# Altium PCB esp8266.pcbdoc
Units mil, origin at the board's own origin, x right, y up, seen from the top; angles counter-clockwise.
Board outline 3456.69 x 4003.93 mil, 2 copper layers (Top Layer, Bottom Layer); 33 components, 118 nets, 125 pads, 90 vias.
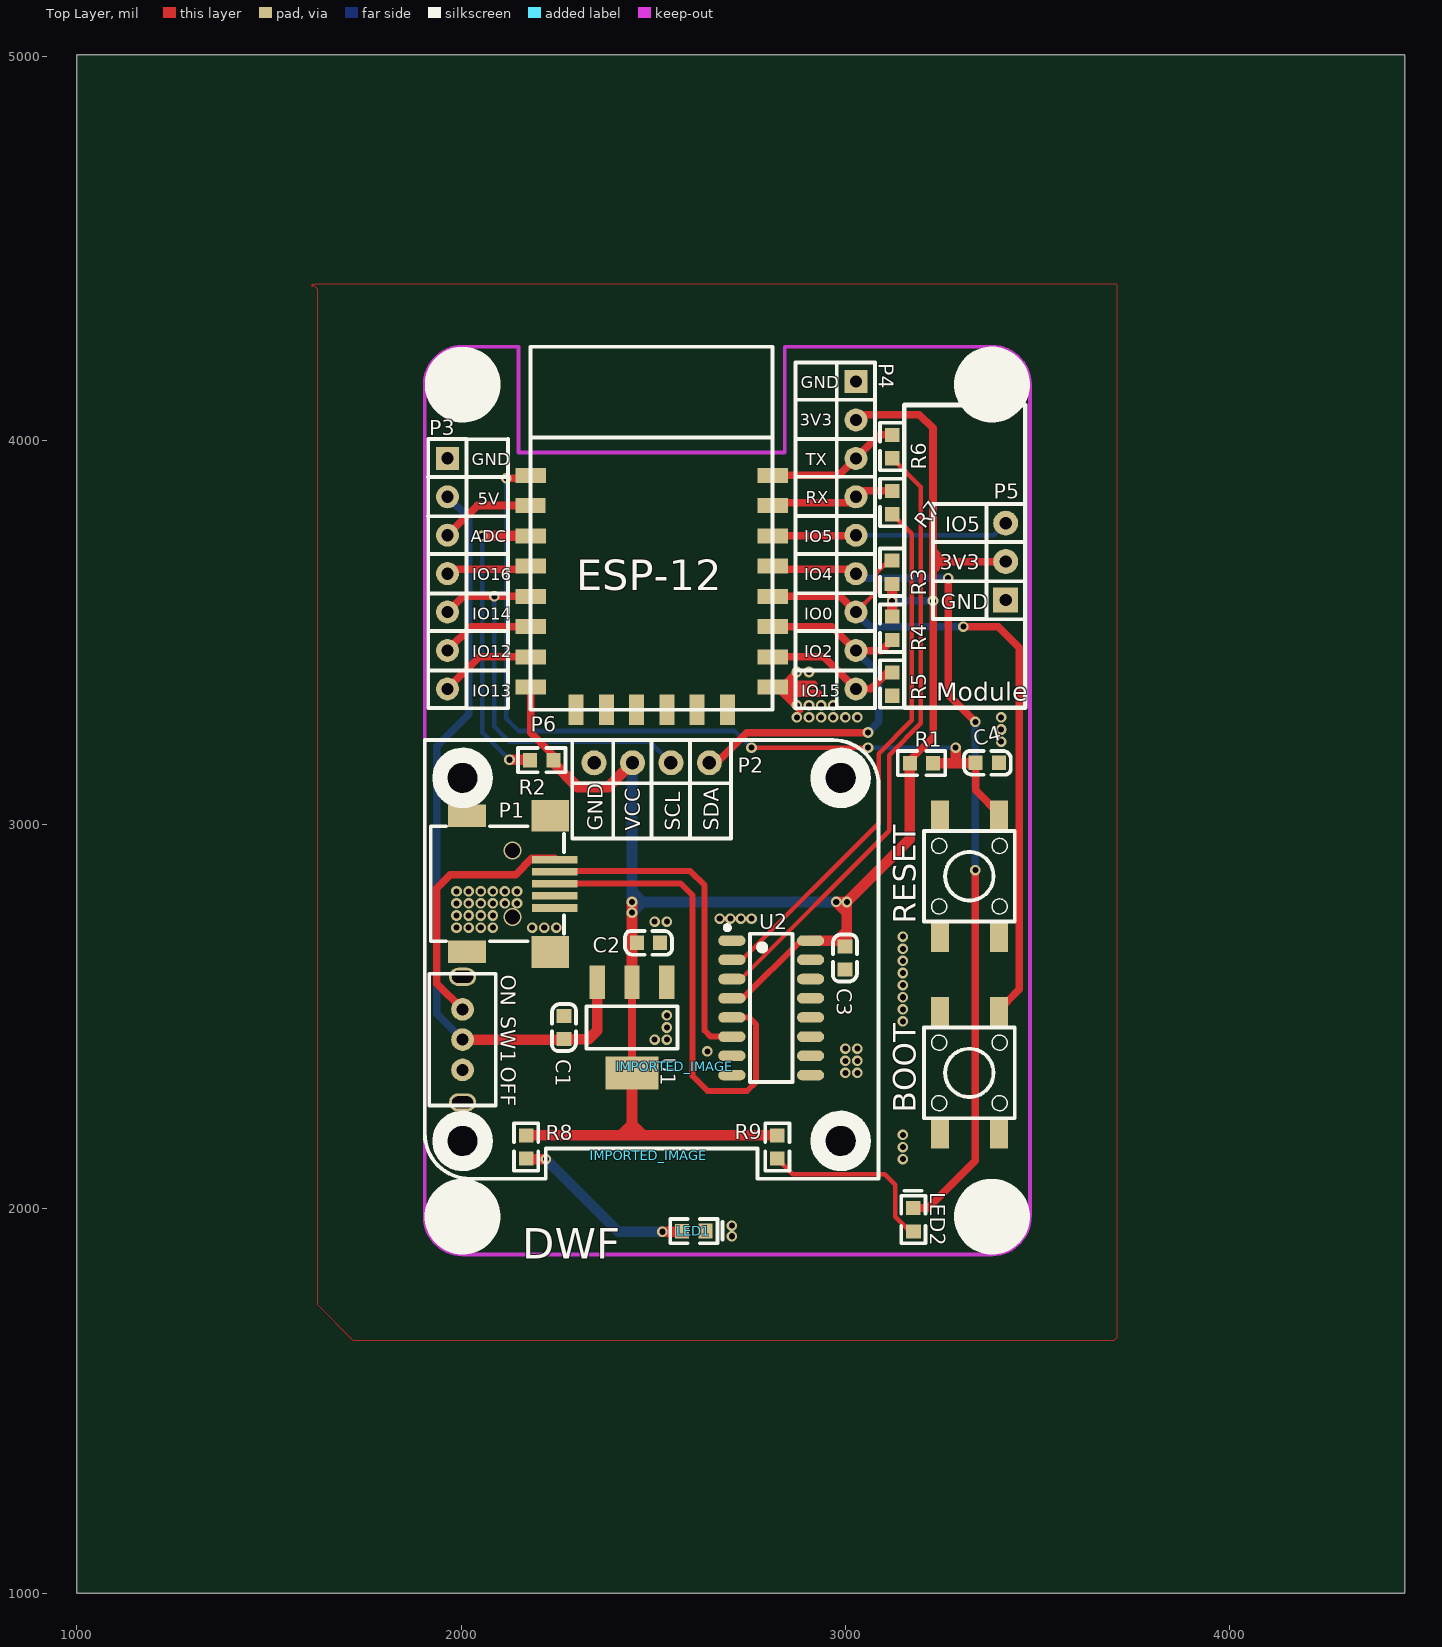
[diagram p0: Top Layer view]
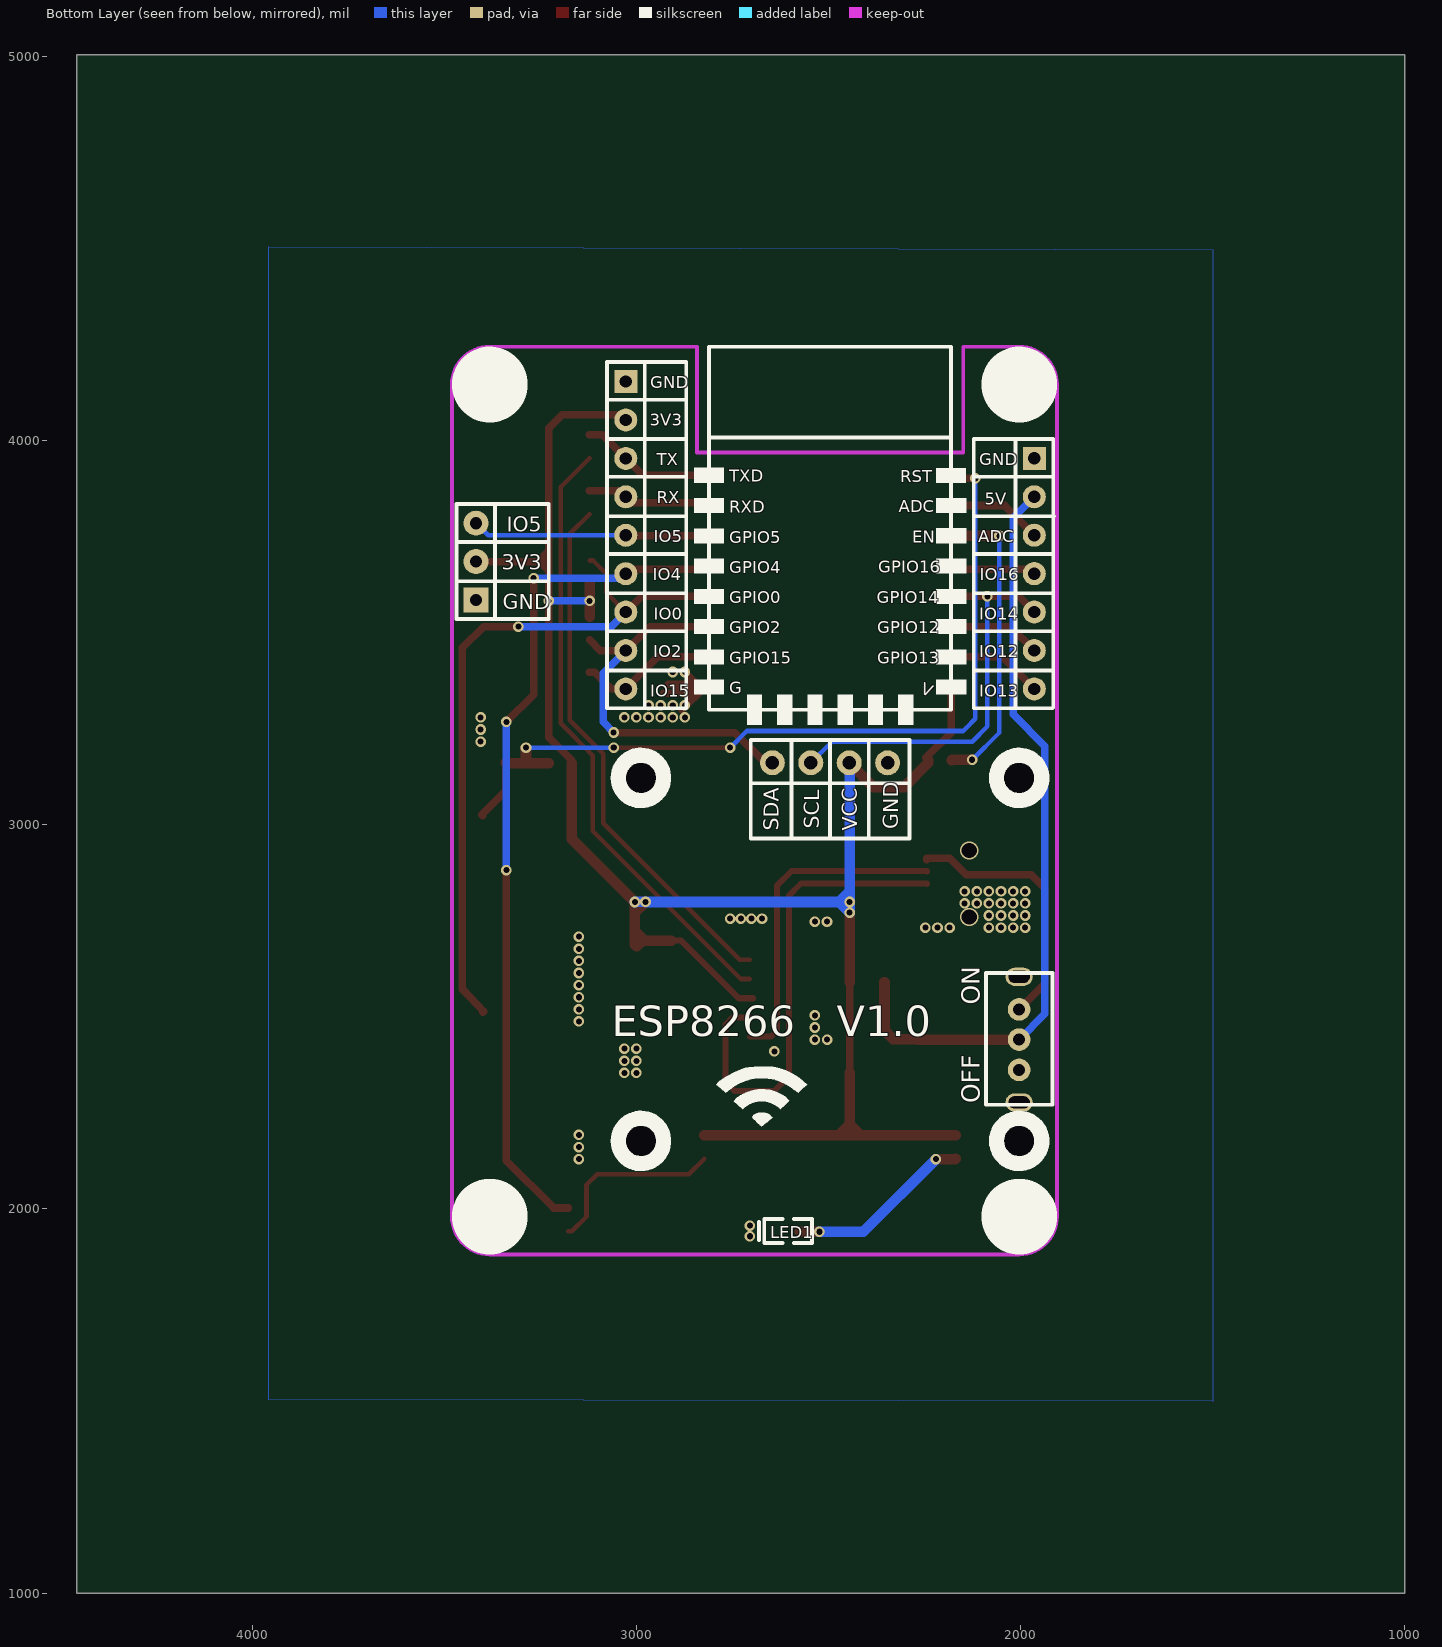
[diagram p1: Bottom Layer view, seen from below]

## Layer stack, top to bottom
Top Solder: solder mask 0.4, Solder Resist, Dk 3.5
Top Layer: signal copper 1.4
Dielectric1: dielectric 12.6, FR-4, Dk 4.8
Bottom Layer: signal copper 1.4
Bottom Solder: solder mask 0.4, Solder Resist, Dk 3.5

## Board outline
4456.69,1000 1000,1000 1000,5003.93 4456.69,5003.93

## Design rules (kind name [scope] priority, off if disabled: settings)
Clearance [All] p1: gap=10 ignorepadtopadclearanceinfootprint=FALSE except(0: Arc-Hole Track-Hole SMDPad-Hole THPad-Hole Via-Hole Fill-Hole Poly-Hole Region-Hole Text-Hole)
PolygonConnect [All] p1: connectstyle=Relief reliefconductorwidth=10 reliefentries=4 polygonreliefangle="90 Angle" airgapwidth=10
RoutingVias [All] p1: holewidth=28 width=50 viastyle="Through Hole" minholewidth=28 minwidth=50 maxholewidth=28 maxwidth=50
SolderMaskExpansion [All] p1: expansion=4 istentingtop=FALSE
Width [All] p1: maxlimit=10 minlimit=10 preferedwidth=10
30 further rules are at their usual default settings.

## Components (designator, comment, footprint, x,y, rotation, side; value= is the part's Value field where it differs from the comment)
BOOT "SW_PUSH_JX" SW_PUSH_6MM_H5MM_JX 3322.94,2354.25 r90 top
C1 "10uF" 0603_C_JX#1 2267.93,2472.3 r270 top
C2 "1uF" 0603_C_JX#2 2488.32,2692.83 r180 top
C3 "104" 0603_C_JX#3 3000.13,2653.46 r90 top
C4 "104" 0603_C_JX#2 3370.2,3161.33 r180 top
IMPORTED_IMAGE "Comment" IMPORTED_IMAGE 2555.8,2370.79 r0 top
IMPORTED_IMAGE "Comment" IMPORTED_IMAGE 2488.87,2138.51 r0 top
LED1 "Red_LED" 0603_D_JX#1 2606.43,1940.86 r180 top
LED2 "Green_LED" 0603_D_JX#2 3177.29,1972.36 r270 top
Module "_" ? 3311.15,3698.74 r0 top
P1 "MINI-USB_JX" USB_MINI_B_FE_JX 2252.1,2846.38 r0 top
P2 "0.96'OLED-IIC(4Pin)" 0.96'OLED-IIC(4PIN) 2496.19,3161.34 r0 top
P3 "M_2.54_1*7P_JX" M_2.54_1*7P_JX 1964.74,3653.52 r270 top
P4 "M_2.54_1*9P_JX" M_2.54_1*9P_JX 3027.74,3753.42 r270 top
P5 "M_2.54_1*3P_JX" 2.54-1*3P_JX 3417.54,3684.92 r90 top
P6 "ESP-12F_JX" ESP-12F_JX 2496.19,3771.57 r0 top
R1 "10k" 0603_R_JX#1 3197.06,3161.28 r0 top
R2 "10k" 0603_R_JX#1 2208.79,3169.21 r0 top
R3 "10k" 0603_R_JX#2 3122.17,3657.4 r270 top
R4 "10k" 0603_R_JX#2 3122.25,3511.67 r270 top
R5 "10k" 0603_R_JX#2 3122.17,3366.06 r90 top
R6 "100R" 0603_R_JX#2 3122.17,3984.17 r90 top
R7 "100R" 0603_R_JX#2 3122.17,3838.5 r90 top
R8 "10k" 0603_R_JX#2 2169.5,2161.27 r90 top
R9 "10k" 0603_R_JX#2 2823.04,2161.27 r90 top
RESET "SW_PUSH_JX" SW_PUSH_6MM_H5MM_JX 3322.94,2866.06 r90 top
SW1 "SW_SK-12D02_JX" SW_SK-12D02_JX 2004.07,2440.86 r180 top
U1 "BL1117-33CX" SOT223_JX 2445.01,2472.36 r90 top
U2 "CH340C_JX" SOP16_150MIL_JX 2807.21,2523.54 r270 top
? "" ? 1786.44,3062.94 r0 top
? "" ? 2693.12,4349.2 r0 top
? "" ? 3585.78,3062.84 r0 top
? "" ? 2693.05,1790.22 r0 top

## Footprints (in the part's own frame and the unit in brackets; to place one, negate y for a bottom-side part, rotate by r counter-clockwise, add the part's x,y. Pads: shape width x height; smd on the part's side, far side on the other; paste and mask are expansions set on the pad)
0.96'OLED-IIC(4PIN) [mm]
  round 1.65 hole 0.89: 1(-3.806,-0.003) 2(-1.266,0) 3(1.274,0) 4(3.814,0)
  round 2 hole 2 unplated: ""(-12.498,-25.002) ""(-12.498,-1.001) ""(12.501,-25.002) ""(12.501,-1.001)
  silkscreen extent -15,-27.5 15,1.5
2.54-1*3P_JX [mil]
  rect 65x65 hole 31.89: 1(-100,0)
  round 65 hole 31.89: 2(0,0) 3(100,0)
  silkscreen extent -150,-50 150,50
0603_C_JX#1 [mil]
  rect 36.61x38.58 smd: 1(-30.31,-0.21) 2(30.37,-0.01)
  silkscreen extent -61,-31 61,31
0603_C_JX#2 [mil]
  rect 36.61x38.58 smd: 1(-30.07,-0.07) 2(30.62,0.13)
  silkscreen extent -61,-31 61,31
0603_C_JX#3 [mil]
  rect 36.61x38.58 smd: 1(-30.63,0.65) 2(30.06,0.85)
  silkscreen extent -61,-30 61,32
0603_D_JX#1 [mil]
  rect 36.61x38.58 smd: 1(31.13,-1.26) 2(-29.55,-1.46)
  silkscreen extent -74,-33 62,30
0603_D_JX#2 [mil]
  rect 36.61x38.58 smd: 1(30.38,-0.01) 2(-30.31,-0.21)
  silkscreen extent -75,-32 61,31
0603_R_JX#1 [mil]
  rect 36.61x38.58 smd: 1(-29,-1.19) 2(31.68,-1.19)
  silkscreen extent -60,-33 63,30
0603_R_JX#2 [mil]
  rect 36.61x38.58 smd: 1(-30.31,-0.11) 2(30.38,-0.11)
  silkscreen extent -62,-32 62,31
ESP-12F_JX [mm]
  rect 2x1 smd: 1(-8,3.499) 2(-8.002,1.504) 3(-8.001,-0.5) 4(-8.001,-2.501) 5(-8.001,-4.502) 6(-8.001,-6.501) 7(-8,-8.5) 8(-8.001,-10.502) 15(7.998,-10.499) 16(7.998,-8.498) 17(7.998,-6.497) 18(8,-4.501) 19(8,-2.501) 20(8,-0.502) 21(8,1.497) 22(8,3.496)
  rect 1x2 smd: 9(-4.996,-11.998) 10(-2.996,-11.999) 11(-0.997,-11.998) 12(1.002,-11.998) 13(3.004,-11.998) 14(5.003,-11.998)
  silkscreen extent -8,-12 8,12
IMPORTED_IMAGE [mil]
M_2.54_1*7P_JX [mm]
  rect 1.52x1.52 hole 0.81: 1(-7.62,0)
  round 1.52 hole 0.81: 2(-5.08,0) 3(-2.54,0) 4(0,0) 5(2.54,0) 6(5.08,0) 7(7.62,0)
  silkscreen extent -8.89,-1.27 8.89,1.27
M_2.54_1*9P_JX [mm]
  rect 1.52x1.52 hole 0.81: 1(-10.16,0)
  round 1.52 hole 0.81: 2(-7.62,0) 3(-5.08,0) 4(-2.54,0) 5(0,0) 6(2.54,0) 7(5.08,0) 8(7.62,0) 9(10.16,0)
  silkscreen extent -11.43,-1.27 11.43,1.27
SOP16_150MIL_JX [mm]
  oval 0.7x1.8 smd: 1(-4.444,-2.6) 2(-3.174,-2.6) 3(-1.904,-2.6) 4(-0.634,-2.6) 5(0.636,-2.6) 6(1.906,-2.6) 7(3.176,-2.6) 8(4.446,-2.6) 9(4.446,2.602) 10(3.176,2.602) 11(1.906,2.602) 12(0.636,2.602) 13(-0.634,2.602) 14(-1.904,2.602) 15(-3.174,2.602) 16(-4.444,2.602)
  silkscreen extent -5.45,-3.05 4.9,1.4
SOT223_JX [mm]
  rect 2.2x1 smd: 1(3,-2.299) 2(3,-0.001) 3(3,2.3)
  rect 2.2x3.5 smd: 2(-3.001,-0.001)
  silkscreen extent -1.4,-3 1.4,3
SW_PUSH_6MM_H5MM_JX [mm]
  rect 2x1.2 smd: 1(-4,-1.95) 2(4,-1.95) 3(4,1.95) 4(-4,1.95)
  silkscreen extent -3,-3 3,3
SW_SK-12D02_JX [mm]
  round 1.5 hole 0.8: 1(0.001,2) 2(0.001,0.001) 3(0.001,-1.998)
  oval 1.8x1.2 hole 0.8 slot 1.4 at 0 deg: ""(0,4.15) ""(0,-4.15)
  silkscreen extent -2.2,-4.35 2.2,4.35
USB_MINI_B_FE_JX [mm]
  rect 3x0.5 smd: 1(-0.2,1.6) 2(-0.2,0.8) 3(-0.2,0) 4(-0.2,-0.8) 5(-0.2,-1.6)
  rect 2.5x1.5 smd: 5(-6,4.496) 5(-6,-4.501)
  rect 2.5x2.1 smd: 5(-0.5,4.501) 5(-0.498,-4.501)
  silkscreen extent -8.4,-3.8 0.4,3.8
? [mil]
  silkscreen extent -157,-394 157,394

## Free pads (board coordinates)
  round 118.11 hole 118.11 unplated: ""(2004.04,1980.22) ""(2004.04,4145.62) ""(3382.04,1980.22) ""(3382.04,4145.62)

## Via types
v1: diameter 27.56, hole 15.75, Top Layer to Bottom Layer, 88 vias
v2: diameter 47.24, hole 39.37, Top Layer to Bottom Layer, 2 vias

## Nets (pads, with @x,y where several pads share a name; then routed paths per layer and width w, separated by ;. In a path a pad name is that pad's centre, name@x,y a point inside that pad or via, vN(x,y) a via of type N, cw(c..) or ccw(c..) an arc to the next point about the centre after c; other vN are vias at no path point)
3V3: C2.2 C3.2 P2.2 P4.2 P5.2 P6.8 R1.1 R2.2 R3.2 R4.1 R8.2 R9.2 U1.2 U2.4 U2.16 | length 5670.1
  Top Layer w15.75: U2.4@2697.04,2548.52 2733.76,2548.52 2883.82,2698.58 U2.16@2909.63,2698.58
  Top Layer w19.68: P6.8 2181.24,3240.06 2246.86,3174.44 R2.2@2240.44,3168.02 ; U1.2@2445.04,2354.22 U1.2@2445.04,2590.42 ; P4.2 3041.16,4066.84 3193.05,4066.84 3228.44,4031.45 3228.44,3681.02 3228.44,3637.72 ; R1.1@3168.04,3160.12 3168.04,3167.83 3228.47,3228.26 v1@3228.47,3582.59 ; v1@3228.44,3583.02 3228.44,3661.22 3252.14,3685.02 P5.2@3417.54,3685.02 ; 3228.44,3688.92 3232.34,3685.02 3279.64,3685.02 ; 3228.44,3720.42 3228.44,3712.52 3256.04,3684.92
  Top Layer w27.56: R8.2 R9.2@2823.14,2191.62 ; R2.2@2240.44,3168.02 2240.44,3161.18 2303.28,3098.34 2383.36,3098.34 P2.2 ; 2393.84,2191.62 2416.24,2191.62 2445.04,2220.42 2473.84,2191.62 2519.84,2191.62 ; 2445.04,2191.62 U1.2@2445.04,2354.22 ; U1.2@2445.04,2590.42 2445.04,2744.01 v1(2445.04,2771.52) 2445.12,2771.53 v1@2445.12,2799.07 ; U2.16 2984.24,2698.52 2999.24,2683.52 3004.14,2688.42 v1(3004.14,2799.02) ; 2948.94,2698.52 2978.34,2698.52 3004.14,2724.32 ; 3004.14,2744.02 3004.14,2771.52 v1(2976.54,2799.12) 3004.04,2799.12 v1(3004.14,2799.02) ; R3.2@3122.04,3627.02 3122.14,3626.92 v1(3122.14,3582.62) R4.1 ; R1.1@3168.04,3160.12 3168.04,2962.92 v1(3004.14,2799.02)
  Bottom Layer w19.68: v1(3122.14,3582.62) v1(3228.44,3582.62)
  Bottom Layer w27.56: 2445.04,2842.42 2445.04,2826.52 2472.54,2799.02 ; v1(2445.14,2799.02) 2976.52,2799.02 v1(2976.54,2799.12) 3004.04,2799.13 v1@3004.11,2799.06 ; P2.2 2445.04,3160.02 v1(2445.04,2771.52) 2472.54,2799.02 ; 2496.24,2799.02 2472.54,2799.02
5V: C1.2 P3.2 SW1.2 U1.3 | length 1983.6
  Top Layer w27.56: SW1.2 2266.84,2440.82 C1.2 2331.9,2441.92 2354.44,2464.46 U1.3@2354.44,2590.42
  Bottom Layer w19.68: P3.2 2019.81,3798.45 2019.81,3287.31 1937.14,3204.64 1937.14,2507.72 SW1.2
$BOARDOUTLINENET: 
ADC: P3.3 P6.2 | length 248.4
  Top Layer w19.68: P3.3 2042.04,3830.82 P6.2
CH340_RXD: R6.1 U2.3 | length 1603.9
  Top Layer w11.81: U2.3@2704.84,2598.62 2728.74,2598.62 3114.34,2984.22 3114.34,3181.02 3196.94,3263.72 3196.94,3879.12 R6.1@3122.24,3953.82
CH340_TXD: R7.1 U2.2 | length 1390.4
  Top Layer w11.81: U2.2@2704.83,2648.58 2731.47,2648.58 3086.74,3003.85 3086.74,3184.92 3173.34,3271.62 3173.34,3757.12 R7.1@3122.24,3808.22
CS: P6.9
ESP_RST: C4.2 P6.1 R1.2 RESET.2 | length 2215.6
  Top Layer w11.81: v1(2756.14,3200.62) v1(3059.14,3200.62) v1@3059.18,3200.7
  Top Layer w19.68: v1(2118.24,3901.52) 2181.24,3901.49 P6.1 ; C4.2 3339.54,3089.64 3402.7,3026.48 RESET.2
  Top Layer w27.56: R1.2 3338.44,3160.12 C4.2 ; 3283.64,3160.12 3287.44,3163.92 v1(3287.44,3200.62)
  Bottom Layer w11.81: v1(2118.24,3901.52) 2118.24,3275.51 2141.86,3251.89 2149.74,3244.01 2362.33,3244.01 2712.67,3244.01 v1(2756.14,3200.62) ; v1(3059.14,3200.62) v1(3287.44,3200.62) v1@3287.53,3200.7
ESP_RXD: P4.4 P6.21 R7.2 | length 327
  Top Layer w19.68: P6.21 2819.12,3838.5 2980.44,3838.5 3012.82,3838.5 P4.4 3043.24,3868.92 R7.2@3122.24,3868.92
ESP_TXD: P4.3 P6.22 R6.2 | length 354.7
  Top Layer w19.68: P6.22 2983.54,3909.22 P4.3 3088.84,4014.52 R6.2@3122.24,4014.52
GND: BOOT.4 C1.1 C2.1 C3.1 C4.1 LED1.2 P1.5 P2.1 P3.1 P4.1 P5.1 P6.15 R5.1 RESET.4 U1.1 U2.1 | length 432.2
  Top Layer w19.68: P6.15@2834.74,3366.13 2917.42,3366.13 ; P6.15@2846.55,3342.48 2929.23,3342.48 ; v1(2874.14,3397.52) 2834.84,3358.22 P6.15 ; 2882.02,3299.13 2822.93,3358.22 P6.15 ; 2901.7,3362.12 2897.8,3358.22 P6.15
  other v1: 2704.84,1929.02 2704.84,1956.62 3149.84,2129.82 3149.84,2161.22 3149.84,2192.72 3000.14,2354.22 3031.64,2354.22 3000.14,2385.72 3031.64,2385.72 2641.04,2410.12 3000.14,2417.22 3031.74,2417.22 2504.04,2440.82 2535.54,2440.82 2535.54,2472.32 3149.74,2488.12 2535.54,2503.82 3149.74,2519.62 3149.74,2551.12 3149.74,2582.62 3149.74,2614.12 3149.74,2645.62 3149.74,2677.12 3149.74,2708.62 1988.34,2732.22 2019.84,2732.22 2051.34,2732.22 2082.84,2732.22 2185.14,2732.22 2216.64,2732.22 2248.14,2732.22 2504.14,2747.92 2535.64,2747.92 2673.34,2755.82 2700.94,2755.82 2728.54,2755.72 2756.14,2755.72 1988.34,2763.72 2019.84,2763.72 2051.34,2763.72 2082.84,2763.72 1988.34,2795.22 2019.84,2795.22 2051.34,2795.22 2082.84,2795.22 2114.34,2795.22 2145.84,2795.22 1988.34,2826.72 2019.84,2826.72 2051.34,2826.72 2082.84,2826.72 2114.34,2826.72 2145.84,2826.72 3405.64,3216.42 3405.74,3247.92 2874.14,3279.42 2905.64,3279.42 2937.14,3279.42 2968.64,3279.42 3000.14,3279.42 3031.64,3279.42 3405.64,3279.42 2874.14,3310.92 2905.64,3310.92 2937.14,3310.92 2968.64,3310.92 2905.64,3397.52
  other v2: 2134.04,2759.79 2134.04,2932.99
GPIO0: BOOT.2 P4.7 P6.18 R3.1 | length 1847.9
  Top Layer w11.81: P4.7 3078.87,3604.55 3078.87,3653.46 3113.13,3687.72 R3.1@3122.04,3687.72
  Top Layer w19.68: P6.18@2811.14,3594.32 2986.84,3594.32 P4.7 ; v1(3307.24,3515.62) 3397.81,3515.62 3452.88,3460.55 3452.88,2571.73 3397.38,2513.99 BOOT.2
  Bottom Layer w19.68: P4.7 3065.48,3515.68 v1@3307.23,3515.68
GPIO2: P2.4 P4.8 P6.17 R4.2 | length 1043.1
  Top Layer w19.68: P2.4 2665.46,3161.32 2744.14,3240 v1(3059.24,3240.02) ; P6.17@2811.14,3515.72 2965.44,3515.72 P4.8 3094.24,3453.42 R4.2
  Bottom Layer w19.68: P4.8 3086.74,3394.42 3086.74,3330.63 3086.74,3267.52 v1(3059.24,3240.02)
GPIO4: LED2.2 P4.6 P6.19 | length 2227.6
  Top Layer w19.68: P6.19 2818.99,3665.27 2960.76,3665.27 3015.89,3665.27 P4.6 ; LED2.2@3177.04,2002.62 3215.43,2002.62 3338.74,2125.93 v1(3338.74,2881.82) ; v1(3267.84,3641.62) 3267.84,3338.5 v1(3338.74,3267.62)
  Bottom Layer w19.68: P4.6 3039.51,3641.65 3098.55,3641.65 v1(3267.84,3641.62) ; v1(3338.74,2881.82) v1(3338.74,3267.62)
GPIO5: P4.5 P5.3 P6.20 | length 620.1
  Top Layer w19.68: P6.20 3026.14,3751.82 P4.5
  Bottom Layer w11.81: P4.5 3386.04,3753.42 P5.3
GPIO9: P6.11
GPIO10: P6.12
GPIO12: P3.6 P6.6 | length 242.2
  Top Layer w19.68: P3.6 2026.84,3515.62 P6.6
GPIO13: P3.7 P6.7 | length 251
  Top Layer w19.68: P3.7 2048.14,3436.92 P6.7
GPIO14: P2.3 P3.5 P6.5 | length 1070.8
  Top Layer w19.68: P3.5 2005.64,3594.42 v1(2086.74,3594.42) 2086.84,3594.32 P6.5
  Bottom Layer w11.81: v1(2086.74,3594.42) 2086.74,3255.83 2126.12,3216.45 2491.21,3216.45 P2.3
GPIO15: P4.9 P6.16 R5.2 | length 363.5
  Top Layer w19.68: P6.16 2944.14,3437.02 P4.9 3066.22,3353.42 3082.8,3370 3109.22,3396.42 R5.2@3122.24,3396.42
GPIO16: P3.4 P6.4 | length 224.6
  Top Layer w19.68: P3.4 1976.49,3665.27 2098.55,3665.27 2173.39,3665.27 P6.4
LED1_1: LED1.1 R8.1 | length 485
  Top Layer w27.56: R8.1@2169.64,2130.92 2170.74,2129.82 v1(2220.64,2129.82) ; v1@2523.86,1940.76 2573.98,1940.76 LED1.1
  Bottom Layer w27.56: v1(2220.64,2129.82) 2409.7,1940.76 v1@2523.86,1940.76
  other v1: 2523.84,1940.82
MISO: P6.10
MOSI: P6.13
P1_1: P1.1 SW1.3 | length 685.9
  Top Layer w19.68: SW1.3 1937.14,2586.42 1937.14,2834.52 1972.54,2870.02 2141.84,2870.02 2184.74,2912.92 2244.24,2912.92 P1.1
R9_1: LED2.1 R9.1 | length 480.8
  Top Layer w11.81: R9.1@2823.14,2130.92 2863.59,2090.47 3102.49,2090.47 3130.05,2062.91 3130.05,1980.23 3168.26,1942.02 LED2.1@3177.24,1942.02
S$6: 
S$35: 
S$43: 
S$77: 
S$600: 
S$602: 
S$604: 
S$606: 
S$608: 
S$610: 
S$612: 
S$614: 
S$618: 
S$623: 
S$625: 
S$631: 
S$633: 
S$635: 
S$674: 
S$676: 
S$689: 
S$691: 
S$693: 
S$796: 
S$798: 
S$800: 
S$802: 
S$1631: 
S$1663: 
S$1665: 
S$1667: 
S$1669: 
S$1671: 
S$1673: 
S$1675: 
S$1677: 
S$1679: 
S$1681: 
S$1683: 
S$1685: 
S$1687: 
S$1689: 
S$1691: 
S$1693: 
S$1695: 
S$1697: 
S$1699: 
S$1701: 
S$1703: 
S$1705: 
S$1707: 
S$1709: 
S$1711: 
S$1713: 
S$1715: 
S$1717: 
S$1719: 
S$1721: 
S$1723: 
S$1744: 
S$1746: 
S$1748: 
S$1750: 
S$1752: 
S$1754: 
S$1756: 
S$1758: 
S$1776: 
S$1778: 
S$1780: 
S$1782: 
S$1784: 
S$1786: 
S$1788: 
S$1807: 
S$1809: 
S$1811: 
S$1813: 
S$1815: 
S$1884: 
S$1886: 
S$1888: 
S$1890: 
S$1936: 
S$1938: 
S$1941: 
S$1943: 
SCK: P6.14
U1_3: P6.3 R2.1 | length 792
  Top Layer w27.56: v1@2055.35,3751.86 P6.3 P6.3@2181.24,3751.82 ; v1(2126.24,3169.12) 2178.74,3169.12 R2.1
  Bottom Layer w11.81: v1(2055.34,3751.82) 2055.34,3240.02 v1(2126.24,3169.12)
USB_D+: P1.3 U2.5 | length 1253.4
  Top Layer w15.75: P1.3 2244.24,2847.12 2571.74,2847.12 2602.54,2816.42 2602.54,2346.32 2641.84,2307.02 2744.24,2307.02 2767.84,2330.62 2767.84,2480.22 2749.54,2498.62 U2.5@2704.84,2498.62
USB_D-: P1.2 U2.6 | length 861.7
  Top Layer w15.75: P1.2 2244.24,2879.42 2596.54,2879.42 2633.94,2842.02 2633.94,2464.52 2649.94,2448.62 U2.6@2704.84,2448.62
pads on no net: BOOT.1 BOOT.3 P1.4 P2. RESET.1 RESET.3 SW1. SW1.1 U2.7 U2.8 U2.9 U2.10 U2.11 U2.12 U2.13 U2.14 U2.15

## Polygon pours and split planes (outlines as drawn)
GND on Bottom Layer "Bottom Layer-GND" (solid, pour order 0): 1500,4496.05 1500,1500 3956.69,1503.93 3956.69,4503.93
GND on Top Layer "Top Layer-GND" (solid, pour order 1): 1720.21,1657.4 1627.29,1750.31 1627.29,4393.22 1616.66,4403.85 1613.12,4400.31 1613.12,4407.4 1616.66,4403.85 1620.21,4407.4 3706.03,4407.4 3706.03,1664.49 3698.94,1657.4 1720.21,1657.4

## Keep-outs
Keep-Out Layer:
  lines w10: 1905.52,1980.35 ccw(c2003.94,1980.35) 2003.94,1881.92 ; 1905.65,4145.56 cw(c2004.07,4145.56) 2004.07,4243.99 ; 3381.91,1881.84 ccw(c3381.91,1980.27) 3480.33,1980.27 ; 3382.01,4244.01 cw(c3382.01,4145.58) 3480.44,4145.58

## Other copper
Top Layer:
  pour cut-out: 2149.73,3968.42 2149.73,3263.7 2842.65,3263.7 2842.65,3968.42

## Silkscreen, mask and mechanical layers (free items; w line width, h text height)
Top Overlay:
  circle w157.48: c2004.07,4145.58 r19.69
  circle w157.48: c3381.9,4145.68 r19.69
  circle w157.48: c2003.97,1980.28 r19.69
  circle w157.48: c3381.9,1980.28 r19.69
  circle w39.37: c2004.07,2177.08 r59.06
  circle w39.37: c2988.2,2177.15 r59.06
  circle w39.37: c2003.97,3121.98 r59.06
  circle w39.37: c2988.2,3121.98 r59.06
  lines w9.84: 2289.5,3108.19 2702.88,3108.19
  lines w10: 1913.51,3803.07 2122.18,3803.07 ; 1913.51,3905.43 2122.18,3905.43 ; 1917.45,3401.49 2122.18,3401.49 ; 1917.45,3503.85 2122.18,3503.85 ; 1917.45,3602.28 2122.18,3602.28 ; 1917.45,3704.64 2122.18,3704.64 ; 2011.94,3303.07 2122.18,3303.07 2122.18,4003.85 ; 2015.88,4003.46 2122.18,4003.46 ; 2870.12,3602.42 3074.82,3602.42 ; 2870.13,3704.76 3074.86,3704.76 ; 2870.13,3803.19 3074.86,3803.19 ; 2870.13,3905.54 3074.86,3905.54 ; 2870.15,4203.46 2976.45,4203.46 ; 2870.21,3401.49 3074.93,3401.49 ; 2870.21,3503.85 3074.93,3503.85 ; 2870.21,4003.85 3074.93,4003.85 ; 2870.21,4106.21 3074.93,4106.21 ; 2870.21,4200.7 2870.21,3303.07 2980.44,3303.07 ; 3228.47,3633.77 3464.69,3633.77 ; 3228.47,3736.14 3464.69,3736.14 ; 3366.27,3535.35 3228.47,3535.35 3228.47,3834.56 3366.27,3834.56
  text "GND" at 2883.94,4136.27 h31.5
  text "3V3" at 2881.94,4037.87 h31.5
  text "GND" at 2027.74,3935.57 h31.5
  text "TX" at 2897.74,3935.47 h31.5
  text "RX" at 2897.74,3837.07 h31.5
  text "5V" at 2043.44,3833.07 h31.5
  text "IO5" at 3259.94,3761.93 h39.37
  text "ADC" at 2025.74,3734.77 h31.5
  text "IO5" at 2893.84,3734.67 h31.5
  text "3V3" at 3246.14,3663.43 h39.37
  text "IO16" at 2029.74,3636.27 h31.5
  text "IO4" at 2893.84,3636.27 h31.5
  text "ESP-12" at 2299.34,3610.55 h78.74
  text "GND" at 3248.14,3561.03 h39.37
  text "IO14" at 2029.64,3533.97 h31.5
  text "IO0" at 2893.84,3533.97 h31.5
  text "IO12" at 2029.74,3435.47 h31.5
  text "IO2" at 2893.84,3435.47 h31.5
  text "IO13" at 2029.64,3333.17 h31.5
  text "IO15" at 2885.94,3333.17 h31.5
  text "ON" at 2102.86,2610.22 h39.37 r270
  text "OFF" at 2102.86,2370.02 h39.37 r270
  text "DWF" at 2159.58,1870.94 h80
Bottom Overlay:
  circle w157.48: c3381.89,4145.69 r19.69
  circle w157.48: c2003.99,4145.69 r19.69
  circle w157.48: c2003.99,1980.26 r19.69
  circle w157.48: c3381.92,1980.26 r19.69
  circle w39.37: c2004.15,3121.9 r59.06
  circle w39.37: c2988.32,3121.96 r59.06
  circle w39.37: c2988.32,2177.08 r59.06
  circle w39.37: c2004.07,2177.08 r59.06
  rectangle: 2141.86,3889.68 2220.6,3929.05
  rectangle: 2141.76,3810.98 2220.5,3850.35
  rectangle: 2141.76,3732.31 2220.5,3771.68
  rectangle: 2141.76,3653.48 2220.5,3692.85
  rectangle: 2141.76,3574.81 2220.5,3614.18
  rectangle: 2141.76,3496.01 2220.5,3535.38
  rectangle: 2141.76,3417.28 2220.5,3456.65
  rectangle: 2141.76,3338.58 2220.5,3377.95
  rectangle: 2279.54,3259.77 2318.91,3338.51
  rectangle: 2358.31,3259.8 2397.68,3338.54
  rectangle: 2437.01,3259.8 2476.38,3338.54
  rectangle: 2515.77,3259.83 2555.14,3338.57
  rectangle: 2594.51,3259.82 2633.88,3338.56
  rectangle: 2673.31,3259.8 2712.68,3338.54
  rectangle: 2771.73,3338.61 2850.47,3377.98
  rectangle: 2771.66,3417.28 2850.4,3456.65
  rectangle: 2771.66,3496.08 2850.4,3535.45
  rectangle: 2771.66,3574.78 2850.4,3614.15
  rectangle: 2771.66,3653.48 2850.4,3692.85
  rectangle: 2771.66,3732.28 2850.4,3771.65
  rectangle: 2771.66,3810.98 2850.4,3850.35
  rectangle: 2771.66,3889.78 2850.4,3929.15
  lines w9.84: 1913.51,3803.07 2122.18,3803.07 ; 1915.48,3503.85 2122.18,3503.85 ; 1917.45,3401.49 2120.21,3401.49 ; 1917.45,3704.64 2122.18,3704.64 ; 1917.45,3905.43 2122.18,3905.43 ; 1919.42,3602.28 2122.18,3602.28 ; 2013.91,3303.07 2013.91,4003.85 ; 2183.2,4007.79 2811.15,4007.79 ; 2289.5,3108.19 2702.88,3108.19 ; 2395.8,2964.48 2395.8,3218.42 ; 2496.19,2966.45 2496.19,3220.39 ; 2590.68,1911.34 2543.43,1911.34 2543.43,1974.33 2590.68,1974.33 ; 2596.58,2966.45 2596.58,3220.39 ; 2620.21,1911.34 2667.45,1911.34 2667.45,1974.33 2620.21,1974.33 ; 2681.23,1919.21 2681.23,1966.46 ; 2872.17,3401.49 3074.93,3401.49 ; 2872.17,3503.85 3074.93,3503.85 ; 2872.17,3602.28 3074.93,3602.28 ; 2872.17,3704.64 3076.9,3704.64 ; 2872.17,3803.07 3076.9,3803.07 ; 2872.17,3905.43 3076.9,3905.43 ; 2872.17,4106.21 3076.9,4106.21 ; 2874.14,4003.85 3076.9,4003.85 ; 2976.5,4204.64 2978.47,4202.67 2978.47,4186.92 2978.47,3305.04 2980.44,3303.07 ; 3076.9,4202.67 3076.9,3303.07 2870.21,3303.07 2870.21,4204.64 3076.9,4204.64 ; 3228.47,3736.14 3468.63,3736.14 ; 3230.44,3633.77 3464.69,3633.77 ; 3368.24,3535.35 3368.24,3834.56 ; 1915.48,3305.04 1915.48,4003.85 2122.18,4003.85 2122.18,3303.07 1960.76,3303.07 1917.45,3303.07 1915.48,3305.04 ; 1917.45,2271.57 1917.45,2614.09 2090.68,2614.09 2090.68,2271.57 1917.45,2271.57 ; 2181.23,3299.13 2181.23,4244.01 2811.15,4244.01 2811.15,3299.13 2181.23,3299.13 ; 2289.5,2964.48 2289.5,3220.39 2702.88,3220.39 2702.88,2964.48 2289.5,2964.48 ; 3228.47,3535.35 3468.63,3535.35 3468.63,3834.56 3228.47,3834.56 3228.47,3535.35
  text "GND" at 2964.44,4136.27 h31.5
  text "3V3" at 2965.84,4037.87 h31.5
  text "GND" at 2108.14,3935.57 h31.5
  text "TX" at 2947.24,3935.47 h31.5
  text "RST" at 2313.04,3891.67 h31.5
  text "TXD" at 2757.94,3892.17 h31.5
  text "RX" at 2947.24,3837.07 h31.5
  text "5V" at 2093.84,3833.07 h31.5
  text "ADC" at 2317.34,3813.47 h31.5
  text "RXD" at 2757.94,3811.47 h31.5
  text "IO5" at 3337.34,3761.93 h39.37
  text "ADC" at 2110.94,3734.77 h31.5
  text "IO5" at 2955.64,3734.67 h31.5
  text "EN" at 2282.04,3734.17 h31.5
  text "GPIO5" at 2757.94,3732.77 h31.5
  text "3V3" at 3350.54,3663.43 h39.37
  text "GPIO16" at 2371.44,3655.97 h31.5
  text "GPIO4" at 2757.94,3653.97 h31.5
  text "IO16" at 2106.64,3636.27 h31.5
  text "IO4" at 2957.14,3636.27 h31.5
  text "GPIO14" at 2374.24,3576.67 h31.5
  text "GPIO0" at 2757.94,3576.77 h31.5
  text "GND" at 3348.64,3561.03 h39.37
  text "IO14" at 2107.64,3533.97 h31.5
  text "IO0" at 2955.64,3533.97 h31.5
  text "GPIO12" at 2372.84,3498.07 h31.5
  text "GPIO2" at 2757.94,3497.97 h31.5
  text "IO12" at 2108.14,3435.47 h31.5
  text "IO2" at 2955.74,3435.47 h31.5
  text "GPIO13" at 2372.84,3419.27 h31.5
  text "GPIO15" at 2757.94,3419.27 h31.5
  text "V" at 2262.48,3342.02 h31.5 r21
  text "G" at 2757.94,3340.57 h31.5
  text "IO13" at 2108.14,3333.17 h31.5
  text "IO15" at 2964.34,3333.17 h31.5
  text "SCL" at 2524.05,2989.52 h39.37 r270
  text "GND" at 2319.05,2988.12 h39.37 r270
  text "VCC" at 2425.66,2984.62 h39.37 r270
  text "SDA" at 2630.36,2984.12 h39.37 r270
  text "ON" at 2106.02,2531.62 h47.24 r270
  text "V1.0" at 2478.94,2449.15 h78.74
  text "ESP8266" at 3064.54,2449.15 h78.74
  text "OFF" at 2106.02,2275.12 h47.24 r270
Mechanical 2:
  circle w10: c2004.07,4145.58 r98.43
  circle w10: c2004.07,1980.23 r98.43
  circle w10: c3382.02,1980.23 r98.43
  circle w10: c3382.02,4145.58 r98.43
Document:
  lines w9.84: 2004.07,1720.39 2004.07,1862.12 ; 3382.02,1728.27 3382.02,1866.06 ; 3500.13,1980.23 3637.92,1980.23 ; 3500.14,4145.62 3637.92,4145.58
  lines w10: 1748.16,1881.81 1893.76,1881.81 ; 1748.16,4244.01 1893.83,4244.01 ; 1905.64,4255.9 1905.64,4401.49 ; 3480.44,4255.87 3480.44,4401.49

## Text inside footprints (layer, text, board x,y; h text height)
P2: Top Overlay "GND" at 2368.32,2984.22 h39.37 r90; Top Overlay "VCC" at 2466.53,2984.22 h39.37 r90; Top Overlay "SCL" at 2571.03,2984.22 h39.37 r90; Top Overlay "SDA" at 2670.93,2984.22 h39.37 r90; Document "0.96'OLED" at 2287.64,2899.4 h47.24; Document "IIC-Connector" at 1681.23,2948.74 h47.24